# Altium PCB TLE5012B.PcbDoc
Units mil, origin at the board's own origin, x right, y up, seen from the top; angles counter-clockwise.
Board outline 925 x 915 mil, 2 copper layers (Top Layer, Bottom Layer); 5 components, 9 nets, 21 pads, 9 vias.
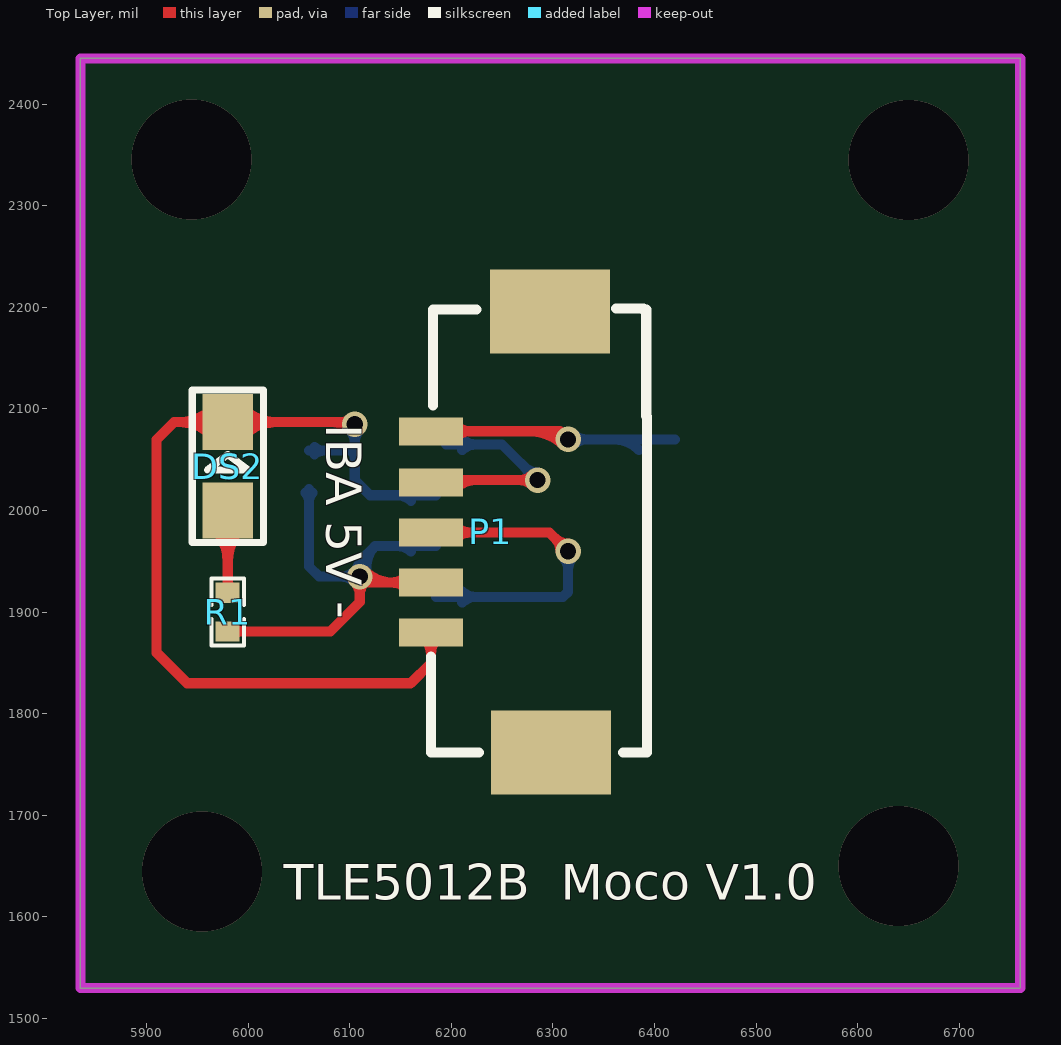
[diagram p0: Top Layer view]
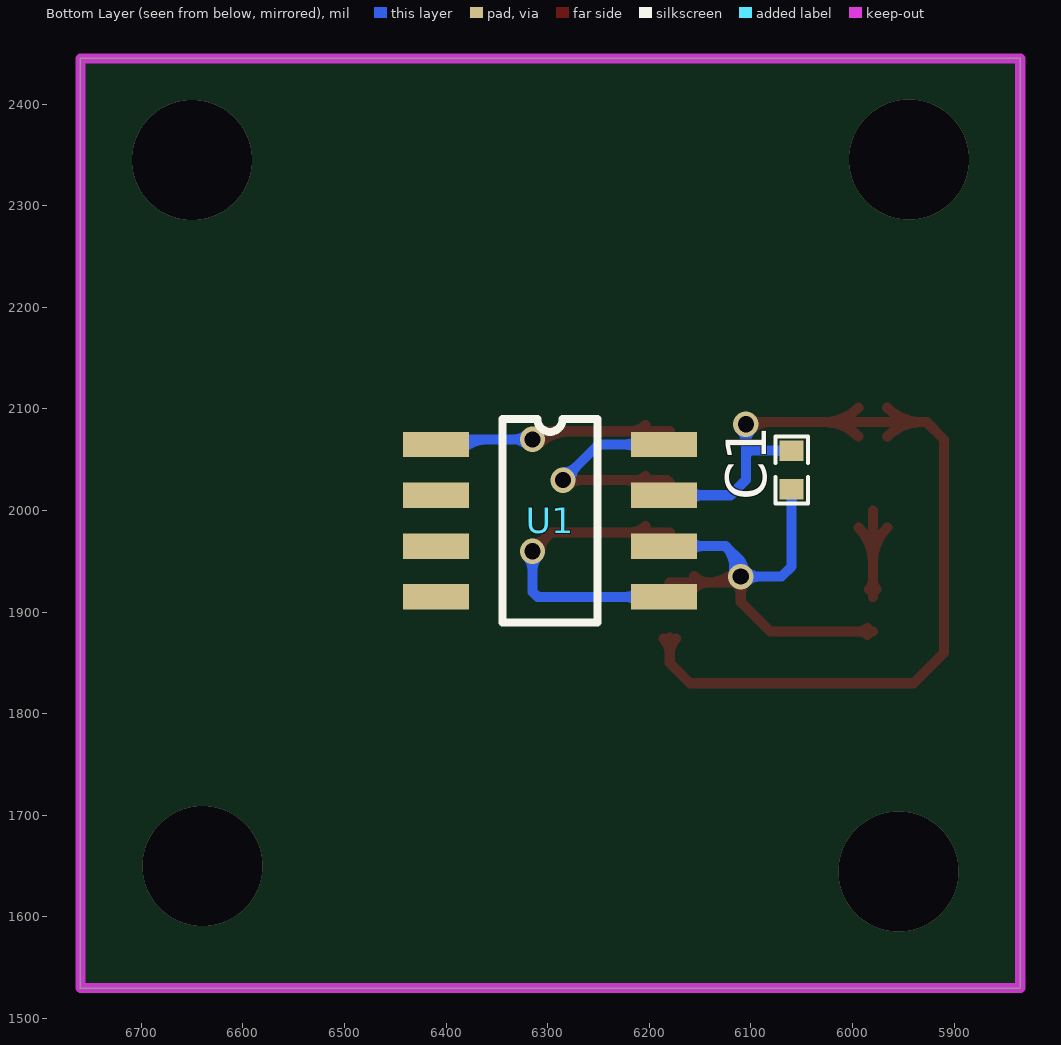
[diagram p1: Bottom Layer view, seen from below]

## Layer stack, top to bottom
Top Layer: signal copper 1.4
Dielectric: dielectric 12.6, FR-4, Dk 4.8
Bottom Layer: signal copper 1.4

## Board outline
5835,1530 6760,1530 6760,2445 5835,2445

## Design rules (kind name [scope] priority, off if disabled: settings)
Clearance [All] p1: gap=10
PolygonConnect [All] p1: connectstyle=Relief reliefconductorwidth=10 reliefentries=4 polygonreliefangle="90 Angle"
RoutingVias [All] p1: holewidth=28 width=50 viastyle="Through Hole" minholewidth=16 minwidth=25 maxholewidth=28 maxwidth=50
SilkscreenOverComponentPads [All] p1: minsilkscreentomaskgap=10
SolderMaskExpansion [All] p1: expansion=4
Width [All] p1: maxlimit=10 minlimit=10 preferedwidth=10
27 further rules are at their usual default settings.

## Components (designator, comment, footprint, x,y, rotation, side; value= is the part's Value field where it differs from the comment)
C1 "100nF" "C 0402" 6060,2040 r90 bottom
DS2 "LED1" SMDLED 5980,2000 r90 top
P1 "Header 5" PH1.25_5 6180,1880 r90 top
R1 "470R" "R 0402" 5980,1900 r90 top
U1 "TLE5012B" SOP-8 6410,2065 r180 bottom

## Footprints (in the part's own frame and the unit in brackets; to place one, negate y for a bottom-side part, rotate by r counter-clockwise, add the part's x,y. Pads: shape width x height; smd on the part's side, far side on the other; paste and mask are expansions set on the pad)
"C 0402" [mil]
  rect 20x23.62 smd: 1(-19,0) 2(19,0)
  silkscreen extent -33,-16 33,16, body extent -20,-10 20,10, height 20
PH1.25_5 [mm]
  rect 0.7x1.6 smd: 1(0,0) 2(1.25,0) 3(2.5,0) 4(3.75,0) 5(5.029,0)
  rect 2.1x3 smd: ""(-3,-3) ""(8.026,-2.972)
  silkscreen extent -3,-5.4 8.1,0
"R 0402" [mil]
  rect 20x23.62 smd: 1(-19,0) 2(19,0)
  silkscreen extent -33,-16 33,16, body extent -20,-10 20,10, height 12
SMDLED [mm]
  rect 1.4x1.27 smd: 1(0.001,-0.002) 2(2.211,-0.002)
  silkscreen extent -0.8,-0.89 3.01,0.89
SOP-8 [mil]
  rect 65x25 smd: 1(0,0) 2(0,-50) 3(0,-100) 4(0,-150) 5(224.41,-150) 6(224.41,-100) 7(224.41,-50) 8(224.41,0)
  silkscreen extent 65,-175 159,25, body extent -8,-174 228,23, height 75

## Part data
C1: library part CAP, "Capacitor"
DS2: library part LED2, "Typical RED, GREEN, YELLOW, AMBER GaAs LED"
P1: "Header, 5-Pin"
R1: library part Res2, "0603"
U1: library part 24C256

## Via types
v1: diameter 25, hole 16, Top Layer to Bottom Layer, 5 vias
v2: diameter 118.11, hole 118.11, Top Layer to Bottom Layer, 4 vias

## Nets (pads, with @x,y where several pads share a name; then routed paths per layer and width w, separated by ;. In a path a pad name is that pad's centre, name@x,y a point inside that pad or via, vN(x,y) a via of type N, cw(c..) or ccw(c..) an arc to the next point about the centre after c; other vN are vias at no path point)
A: P1.3 U1.5 | length 433.3
  Top Layer w10: P1.3 6296.57,1978.43 v1(6315,1960) ; P1.3@6203.92,1972.22 cw(c6218.91,1957.23) 6218.91,1978.43 cw(c6218.91,1999.62) P1.3@6203.92,1984.63 ; v1@6307.5,1960 ccw(c6289.39,1960) 6302.2,1972.8 ccw(c6315,1985.61) v1@6315,1967.5
  Bottom Layer w10: U1.5@6185,1915 U1.5 6310,1915 6315,1920 v1(6315,1960) ; U1.5@6210.89,1909.7 cw(c6223.7,1896.89) 6223.7,1915 cw(c6223.7,1933.11) U1.5@6210.89,1920.3 ; v1@6309.7,1954.7 cw(c6296.89,1941.89) 6315,1941.89 cw(c6333.11,1941.89) v1@6320.3,1954.7
B: P1.4 U1.8 | length 329.1
  Top Layer w10: P1.4 6182.36,2030 v1(6285,2030) ; P1.4@6203.92,2021.43 cw(c6224.61,2000.74) 6224.61,2030 ; P1.4@6203.92,2033.85 ccw(c6213.21,2043.13) 6213.21,2030 ; v1@6279.7,2024.7 ccw(c6266.89,2011.89) 6266.89,2030 ccw(c6266.89,2048.11) v1@6279.7,2035.3
  Bottom Layer w10: U1.8@6195,2065 6250,2065 v1(6285,2030) ; U1.8@6210.89,2059.7 cw(c6223.7,2046.89) 6223.7,2065 cw(c6223.7,2083.11) U1.8@6210.89,2070.3 ; v1@6277.5,2030 ccw(c6259.39,2030) 6272.2,2042.8 ccw(c6285,2055.61) v1@6285,2037.5
CS: U1.3
DATA: U1.4
GND: C1.2 DS2.2 P1.1 U1.7 | length 1202.9
  Top Layer w10: DS2.2@5965.92,2072.9 ccw(c5931.78,2038.76) 5931.78,2087.04 ccw(c5931.78,2135.32) DS2.2@5965.92,2101.18 ; DS2.2@5994.21,2072.9 cw(c6028.35,2038.76) 6028.35,2087.04 cw(c6028.35,2135.32) DS2.2@5994.21,2101.18 ; 6081.97,2087.04 cw(c6081.97,2061.97) v1@6099.7,2079.7 ; 6091.82,2087.04 ccw(c6091.82,2098.18) v1@6099.7,2090.3 ; v1@6102.96,2087.04 DS2.2 5927.04,2087.04 5910,2070 5910,1860 5940,1830 6160,1830 6180,1850 P1.1@6180,1875 ; P1.1@6173.79,1873.79 cw(c6158.8,1858.8) 6180,1858.8 cw(c6201.2,1858.8) P1.1@6186.21,1873.79
  Bottom Layer w10: C1.2 6101,2059 6105,2055 ; C1.2@6065.35,2055.46 cw(c6073.88,2046.93) 6073.88,2059 cw(c6073.88,2071.07) C1.2@6065.35,2062.54 ; v1@6099.7,2079.7 cw(c6086.89,2066.89) 6105,2066.89 cw(c6123.11,2066.89) v1@6110.3,2079.7 ; v1(6105,2085) 6105,2055 ; U1.7@6160.29,2009.7 ccw(c6147.48,1996.89) 6147.48,2015 ccw(c6147.48,2033.11) U1.7@6160.29,2020.3 ; U1.7@6185,2015 6120,2015 6105,2030 6105,2055
I: P1.5 U1.1 | length 385.1
  Top Layer w10: P1.5 6307,2078 v1(6315,2070) ; P1.5@6203.92,2071.79 cw(c6218.91,2056.8) 6218.91,2078 cw(c6218.91,2099.2) P1.5@6203.92,2084.21 ; 6277.58,2078 cw(c6277.58,2032.58) v1@6309.7,2064.7 ; 6301.72,2078 cw(c6301.72,2056.72) v1@6316.77,2071.77
  Bottom Layer w10: v1(6315,2070) U1.1@6420,2070 ; v1@6320.3,2064.7 cw(c6333.11,2051.89) 6333.11,2070 cw(c6333.11,2088.11) v1@6320.3,2075.3 ; 6359.82,2070 cw(c6359.82,2034.82) U1.1@6384.7,2059.7
NetDS2_1: DS2.1 R1.2 | length 179.9
  Top Layer w10: DS2.1@5965.92,1983.33 cw(c5931.78,1949.19) 5980.06,1949.19 cw(c6028.35,1949.19) DS2.1@5994.21,1983.33 ; R1.2@5976.46,1922.54 ccw(c5967.77,1931.23) 5980.06,1931.23 ; R1.2@5980,1915 5980.06,1915.06 DS2.1 ; 5980.06,1930.92 ccw(c5991.92,1930.92) R1.2@5983.54,1922.54
SCK: U1.2
VCC: C1.1 P1.2 R1.1 U1.6 | length 707.3
  Top Layer w10: R1.1 6081,1881 6110,1910 v1(6110,1935) 6115.79,1929.21 P1.2 ; R1.1@5985.35,1877.46 cw(c5993.88,1868.93) 5993.88,1881 cw(c5993.88,1893.07) R1.1@5985.35,1884.54 ; v1@6104.7,1929.7 cw(c6091.89,1916.89) 6110,1916.89 cw(c6128.11,1916.89) v1@6115.3,1929.7 ; v1@6115.3,1940.3 ccw(c6142.08,1967.08) 6142.08,1929.21 ; P1.2@6156.08,1923 ccw(c6141.09,1908.02) 6141.09,1929.21 ccw(c6141.09,1950.41) P1.2@6156.08,1935.42
  Bottom Layer w10: C1.1@6056.46,2017.46 cw(c6047.93,2008.93) 6060,2008.93 cw(c6072.07,2008.93) C1.1@6063.54,2017.46 ; C1.1 6060,1945 6070,1935 v1(6110,1935) ; v1@6104.7,1929.7 ccw(c6091.89,1916.89) 6091.89,1935 ccw(c6091.89,1953.11) v1@6104.7,1940.3 ; v1@6107.58,1934.38 cw(c6126.06,1939.09) 6112.57,1952.57 ; v1@6115,1935 v1(6110,1935) ; v1@6117.27,1936.85 cw(c6145.87,1944.13) 6125,1965 ; U1.6@6160.29,1959.7 ccw(c6147.48,1946.89) 6147.48,1965 ccw(c6147.48,1983.11) U1.6@6160.29,1970.3 ; U1.6@6185,1965 6125,1965 ; v1(6110,1935) 6110,1950 6125,1965
pads on no net: P1.
copper on no net:
  other v2: 5954.89,1644.89 6640,1650 5944.5,2345.5 6650,2345

## Keep-outs
Keep-Out Layer:
  the board outline again, w10

## Silkscreen, mask and mechanical layers (free items; w line width, h text height)
Top Overlay:
  text "IBA 5V -" at 6065,2085 h60 r270
  text "TLE5012B  Moco V1.0" at 6035,1605 h60